# Altium PCB PCB1.PcbDoc
Units mil, origin at the board's own origin, x right, y up, seen from the top; angles counter-clockwise.
Board outline 628 x 803 mil, 2 copper layers (Top Layer, Bottom Layer), stack 61.855 mil thick; 12 components, 13 nets, 44 pads, 0 vias.
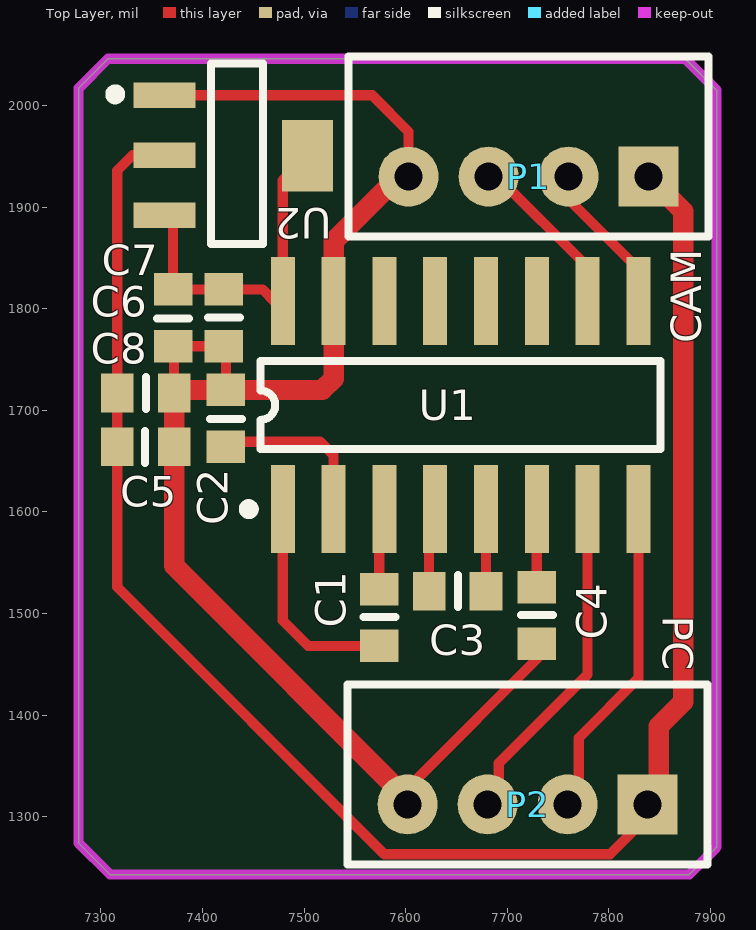
[diagram p0: Top Layer view]
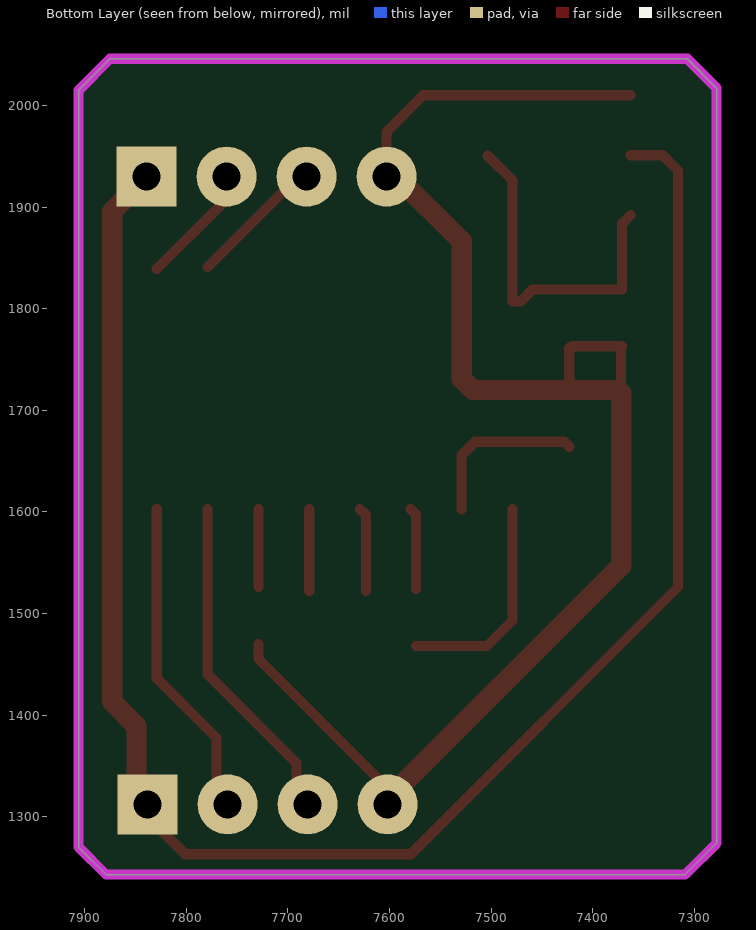
[diagram p1: Bottom Layer view, seen from below]
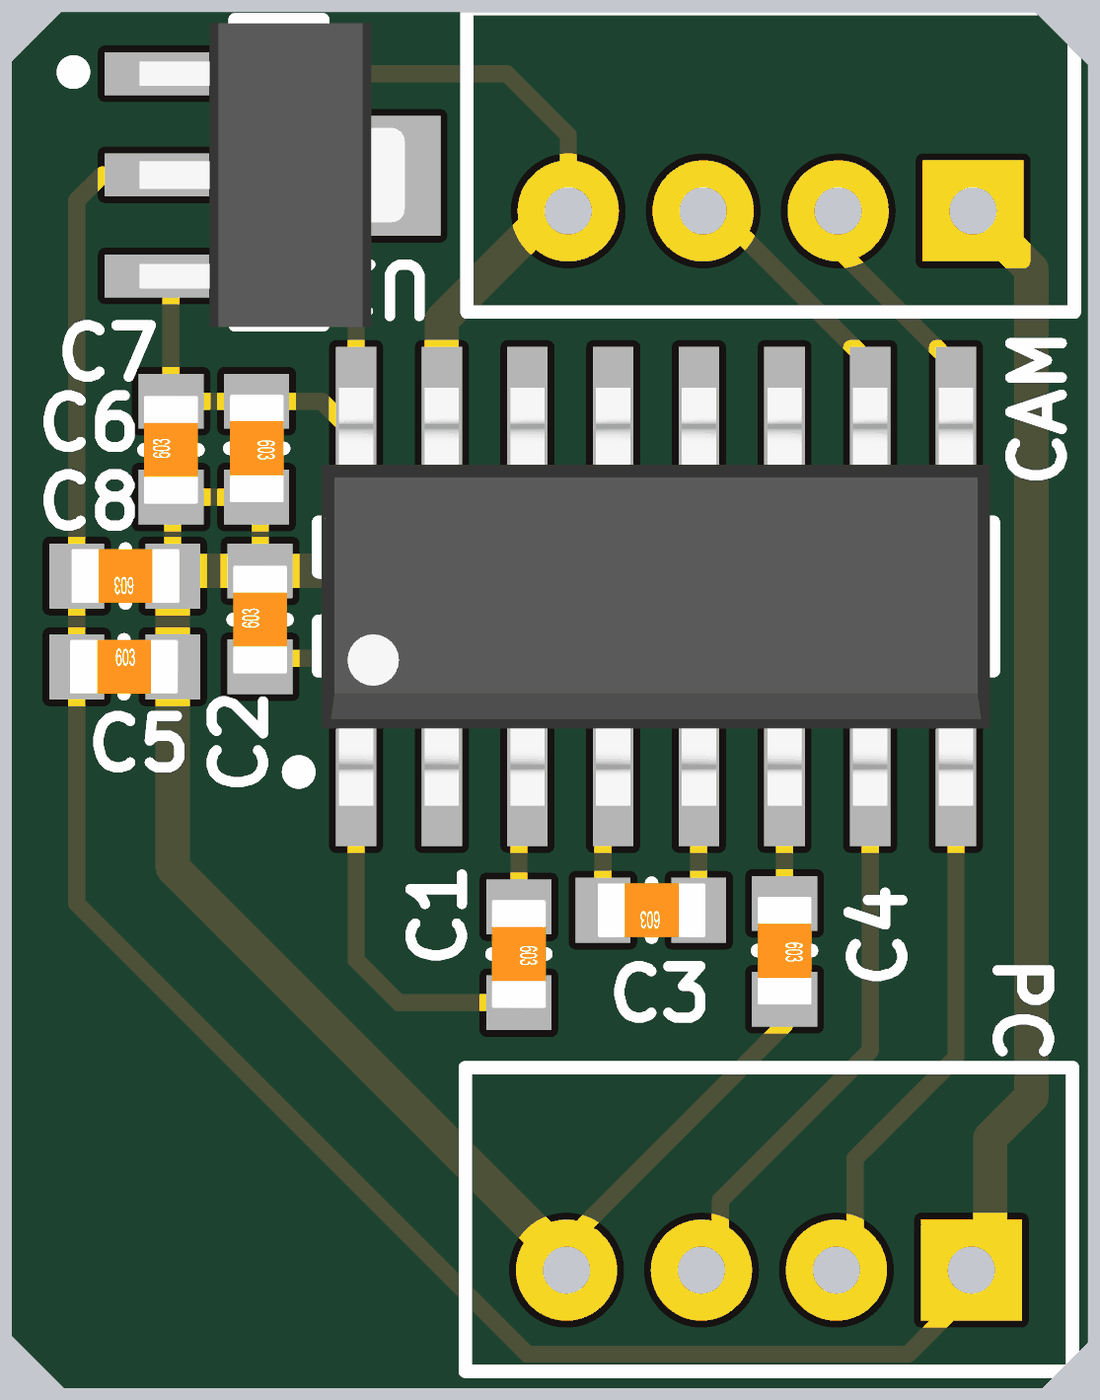
[diagram p2: 3D render of the assembled board from above, using the file's embedded part models]

## Layer stack, top to bottom
Top Layer: signal copper 1.4
Dielectric: core 59.0551, FR-4, Dk 4.8
Bottom Layer: signal copper 1.4

## Board outline
7278,1274 7278,2017 7307,2046 7875.06,2046 7906,2015.06 7906,1270 7879,1243 7309,1243

## Design rules (kind name [scope] priority, off if disabled: settings)
Clearance [All] p1: gap=10
PolygonConnect [All] p1: connectstyle=Relief reliefconductorwidth=10 reliefentries=4 polygonreliefangle="90 Angle"
RoutingVias [All] p1: holewidth=28 width=50 viastyle="Through Hole" minholewidth=28 minwidth=50 maxholewidth=28 maxwidth=50
SilkscreenOverComponentPads [All] p1: minsilkscreentomaskgap=10
SolderMaskExpansion [All] p1: expansion=4
Width [All] p1: maxlimit=100 minlimit=10 preferedwidth=10
27 further rules are at their usual default settings.

## Components (designator, comment, footprint, x,y, rotation, side; value= is the part's Value field where it differs from the comment)
C1 "100nF-16V-20%" C0603 7574,1524 r270 top
C2 "100nF-16V-20%" C0603 7423,1664 r90 top
C3 "100nF-16V-20%" C0603 7679,1522 r180 top
C4 "100nF-16V-20%" C0603 7729,1526 r270 top
C5 "100nF-16V-20%" C0603 7316,1664 r0 top
C6 "100nF-16V-20%" C0603 7371,1763 r90 top
C7 "100nF-16V-20%" C0603 7421,1819 r270 top
C8 "10uF-6V3-20%" C0603 7372,1717 r180 top
P1 "CAM" Header-2mm-4pin 7839,1930 r180 top
P2 "PC" Header-2mm-4pin 7838,1312 r180 top
U1 "MAX3232CSE" SO16-150mil 7654,1705 r0 top
U2 "BM7133-1" SOT_89 7433,1951 r270 top

## Footprints (in the part's own frame and the unit in brackets; to place one, negate y for a bottom-side part, rotate by r counter-clockwise, add the part's x,y. Pads: shape width x height; smd on the part's side, far side on the other; paste and mask are expansions set on the pad)
C0603 [mil]
  rect 32x38 smd: 1(0,0) 2(56,0)
  silkscreen extent 28,-16 28,16, body extent -4,-16 59,16, height 12
Header-2mm-4pin [mm]
  rect 1.5x1.5 hole 0.7: 1(0,0)
  round 1.5 hole 0.7: 2(2,0) 3(4,0) 4(6,0)
  silkscreen extent -1.5,-3 7.5,1.5
SO16-150mil [mm] "Small Outline; 16 Leads; Body Width 3.9 mm; Pitch 1.27 mm"
  rect 0.6x2.2 smd: 1(-4.445,-2.6) 2(-3.175,-2.6) 3(-1.905,-2.6) 4(-0.635,-2.6) 5(0.635,-2.6) 6(1.905,-2.6) 7(3.175,-2.6) 8(4.445,-2.6) 9(4.445,2.6) 10(3.175,2.6) 11(1.905,2.6) 12(0.635,2.6) 13(-0.635,2.6) 14(-1.905,2.6) 15(-3.175,2.6) 16(-4.445,2.6)
  silkscreen extent -5.42,-2.72 5,1.1, body extent -4.95,-3.1 4.95,3.1, height 1.7
SOT_89 [mm]
  rect 0.635x1.55 smd: 1(-1.499,-1.785) 2(0,-1.785) 3(1.499,-1.785)
  rect 1.778x1.27 smd: 4(0.011,1.785)
  silkscreen extent -2.3,-3.15 2.22,0.68, body extent -2.25,-2.04 2.25,1.89, height 1.4

## Part data
C1 C2 C3 C4 C5 C6 C7: library part Cap, "CAP CER 0.1UF 16V Y5V 0603"
C8: library part Cap, "CAP CER 10UF 6.3V 20% X5R 0603"
P1 P2: library part MHDR1X4, "Header, 4-Pin"
U1: "3.0V TO 5.5V, Low-Power, up to 1Mbps, True RS-232 Transceiver Using Four 0.1µF External Capacitor"
U2: library part LM117_0

## Nets (pads, with @x,y where several pads share a name; then routed paths per layer and width w, separated by ;. In a path a pad name is that pad's centre, name@x,y a point inside that pad or via, vN(x,y) a via of type N, cw(c..) or ccw(c..) an arc to the next point about the centre after c; other vN are vias at no path point)
3V3: C6.2 C7.1 U1.16 U2.3 U2.4 | length 342.5
  Top Layer w10: U2.3 7371,1883.72 C6.2 C7.1 7459,1819 7470.64,1807.36 U1.16 7479,1926.28 U2.4
GND: C2.2 C4.2 C5.2 C6.1 C7.2 C8.1 P1.4 P2.4 U1.15 U2.1 | length 1543.2
  Top Layer w10: U2.1 7567,2010 7602.78,1974.22 P1.4 ; C8.1@7375,1720 C8.1 7372,1762 C6.1 C7.2 7423,1761 C2.2 ; P2.4@7608,1311 7612.78,1311 7612.78,1338.89 7729,1455.11 C4.2
  Top Layer w20: C8.1 C5.2 7372,1547 P2.4@7608,1311 ; C8.1@7375,1720 C2.2 7518,1720 7529,1731 U1.15 7529,1866.28 P1.4@7592.72,1930
NetC1_1: C1.1 U1.3 | length 80.7
  Top Layer w10: C1.1 7574,1597.64 U1.3
NetC1_2: C1.2 U1.1 | length 215
  Top Layer w10: U1.1 7479,1493 7504,1468 C1.2
NetC2_1: C2.1 U1.2 | length 166.6
  Top Layer w10: C2.1 7428,1669 7515.69,1669 7529,1655.69 U1.2
NetC3_1: C3.1 U1.5 | length 80.6
  Top Layer w10: C3.1 U1.5
NetC3_2: C3.2 U1.4 | length 83.1
  Top Layer w10: C3.2 7623,1596.64 U1.4
NetC4_1: C4.1 U1.6 | length 76.6
  Top Layer w10: C4.1 U1.6
NetP1_2: P1.2 U1.9 | length 119.5
  Top Layer w10: P1.2 7760.26,1907.74 U1.9@7829,1839
NetP1_3: P1.3 U1.10 | length 134.3
  Top Layer w10: P1.3 7690,1930 U1.10@7779,1841
NetP2_2: P2.2 U1.8 | length 316
  Top Layer w10: P2.2@7770.26,1311 7770.26,1377.37 7829,1436.11 U1.8
NetP2_3: P2.3 U1.7 | length 327.9
  Top Layer w10: P2.3@7691.52,1311 7691.52,1352.63 7779,1440.11 U1.7
VIN: C5.1 C8.2 P1.1 P2.1 U2.2 | length 1767.8
  Top Layer w10: U2.2 7331,1951 7316,1936 C8.2 C5.1 7316,1526 7579,1263 7801,1263 P2.1@7849,1311
  Top Layer w20: P1.1 7873,1896 7873,1413 7849,1389 P2.1@7849,1311
pads on no net: U1.11 U1.12 U1.13 U1.14

## Keep-outs
Keep-Out Layer:
  the board outline again, w10